# Altium PCB prototype.PcbDoc
Units mm, origin at the board's own origin, x right, y up, seen from the top; angles counter-clockwise.
Board outline 152.4 x 101.6 mm, 2 copper layers (Top Layer, Bottom Layer); 6 components, 0 nets, 36 pads, 0 vias.
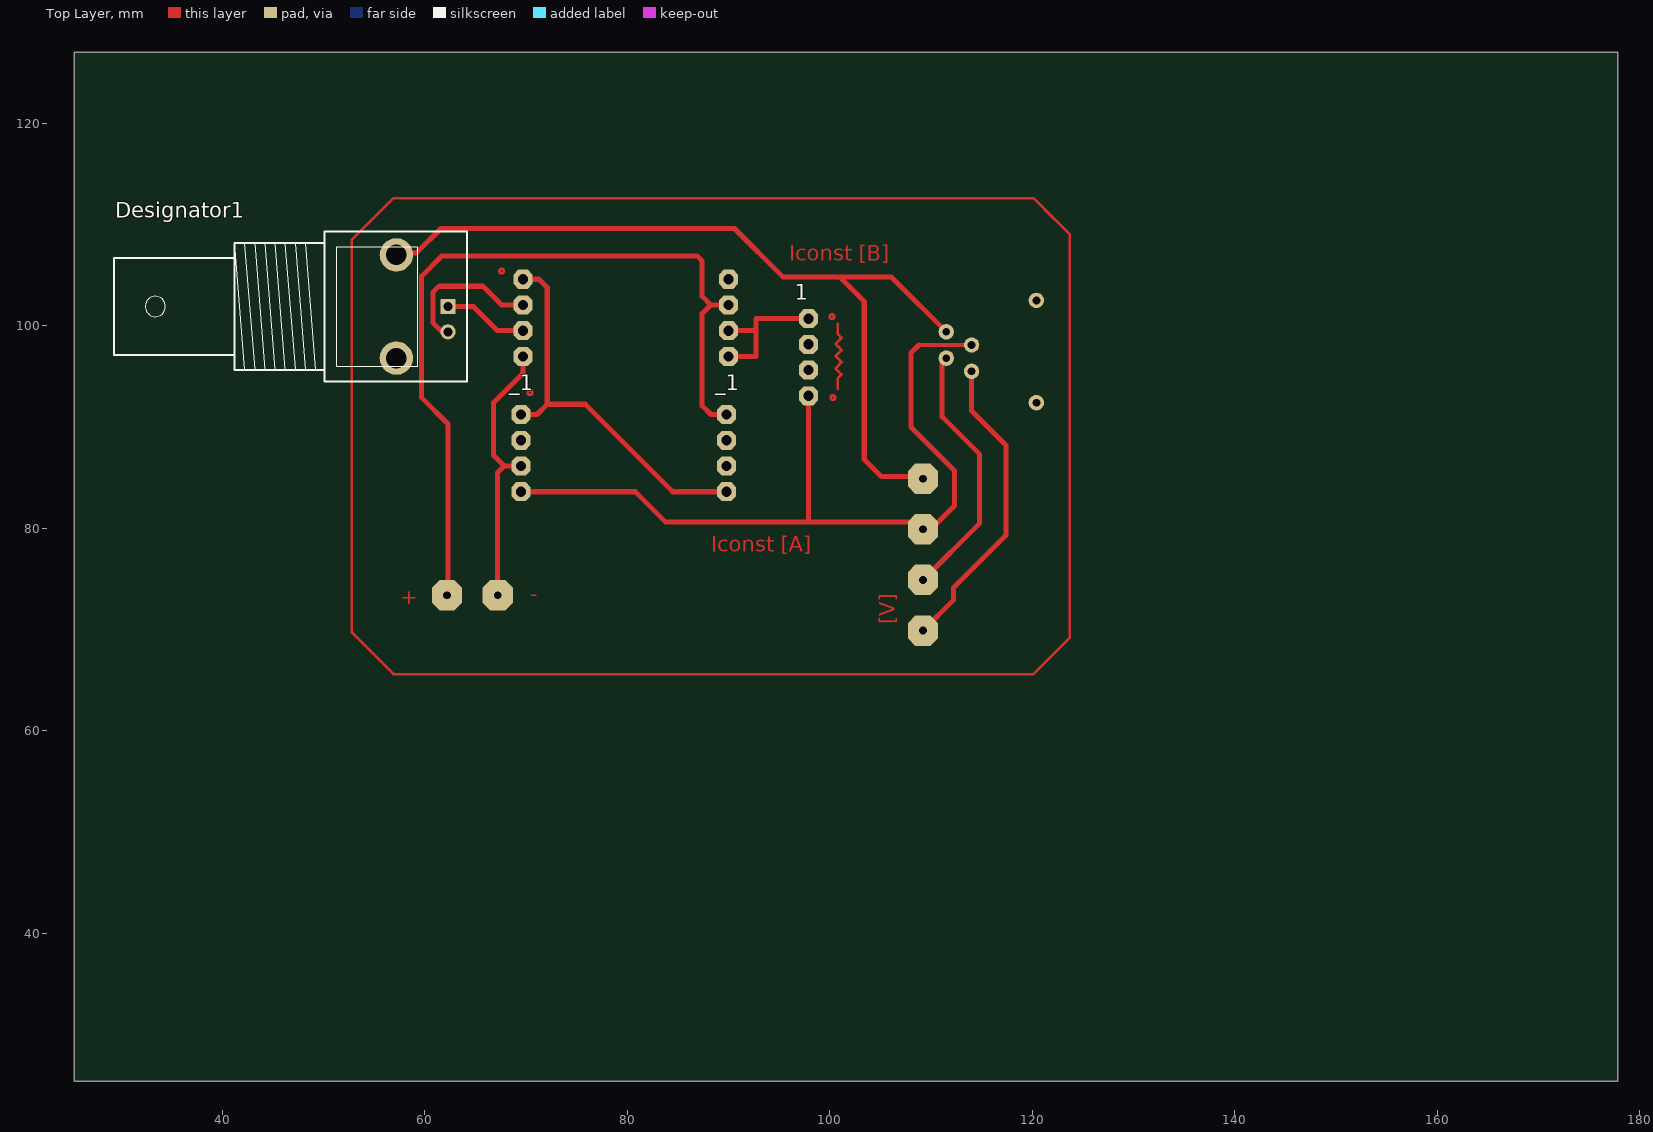
[diagram p0: Top Layer view]
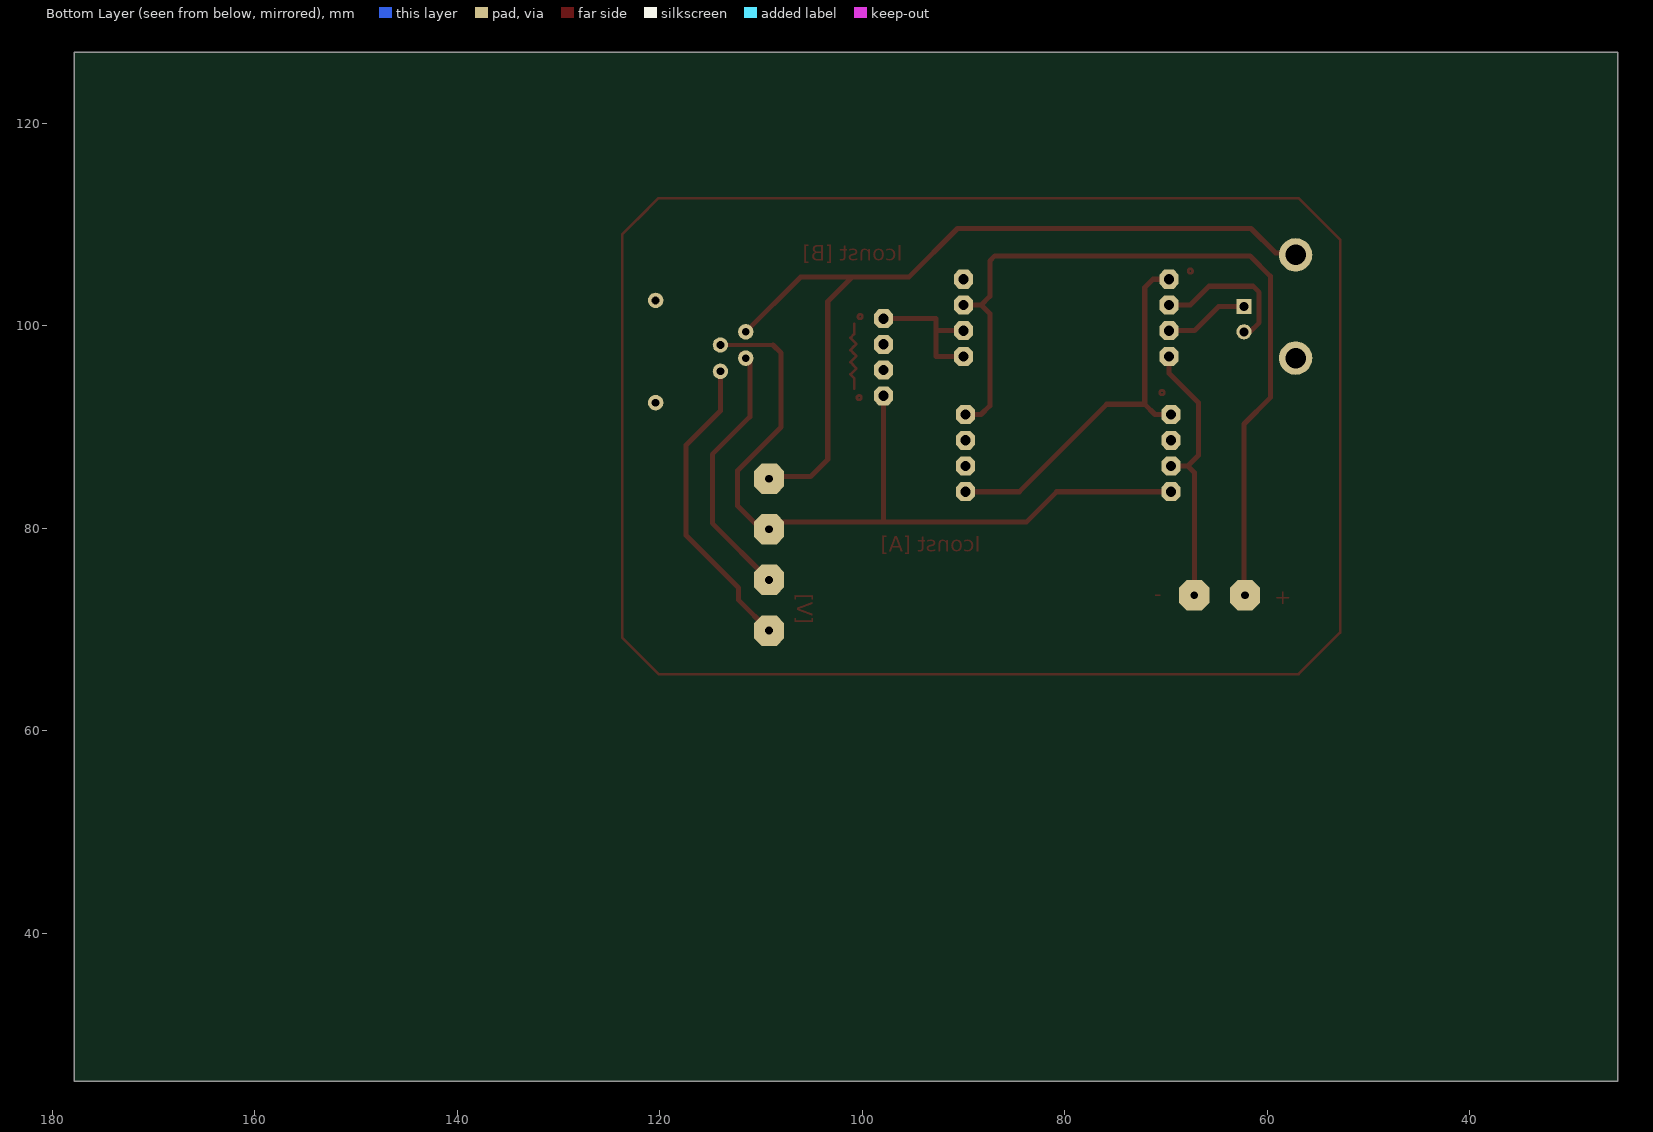
[diagram p1: Bottom Layer view, seen from below]

## Layer stack, top to bottom
Top Solder: solder mask 0.0102, Solder Resist, Dk 3.5
Top Layer: signal copper 0.0356
Dielectric 1: dielectric 0.32, FR-4, Dk 4.8
Bottom Layer: signal copper 0.0356
Bottom Solder: solder mask 0.0102, Solder Resist, Dk 3.5

## Board outline
25.4,25.4 177.8,25.4 177.8,127 25.4,127

## Design rules (kind name [scope] priority, off if disabled: settings)
Clearance [All] p1: gap=0.254 ignorepadtopadclearanceinfootprint=FALSE except(0: Arc-Hole Track-Hole SMDPad-Hole THPad-Hole Via-Hole Fill-Hole Poly-Hole Region-Hole Text-Hole)
PolygonConnect [All] p1: connectstyle=Relief reliefconductorwidth=0.254 reliefentries=4 polygonreliefangle="90 Angle" airgapwidth=0.254
RoutingVias [All] p1: holewidth=0.711 width=1.27 viastyle="Through Hole" minholewidth=0.711 minwidth=1.27 maxholewidth=0.711 maxwidth=1.27
SolderMaskExpansion [All] p1: expansion=0.102
Width [All] p1: maxlimit=0.254 minlimit=0.254 preferedwidth=0.254
30 further rules are at their usual default settings.

## Components (designator, comment, footprint, x,y, rotation, side; value= is the part's Value field where it differs from the comment)
1 "Comment" 1X04#1 97.9,93.08 r90 top
_1 "Comment" 1X04#2 69.5,91.23 r270 top
_1 "Comment" 1X04#3 89.79,91.23 r270 top
Designator1 "Comment" "BNC_RA CON" 62.3,101.9 r0 top
? "Comment" 1X04#4 69.71,96.97 r90 top
? "Comment" 1X04#1 90,96.97 r90 top

## Footprints (in the part's own frame and the unit in brackets; to place one, negate y for a bottom-side part, rotate by r counter-clockwise, add the part's x,y. Pads: shape width x height; smd on the part's side, far side on the other; paste and mask are expansions set on the pad)
1X04#1 [mil]
  oct 74x74 hole 40: 5(0,0) 6(100,0) 7(200,0) 8(300,0)
1X04#2 [mil]
  oct 74x74 hole 40: 1(0,0) 2(200,0) 3(300,0) NC(100,0)
1X04#3 [mil]
  oct 74x74 hole 40: 4(300,0) 5(0,0) NC(100,0) NC(200,0)
1X04#4 [mil]
  oct 74x74 hole 40: 1(300,0) 2(200,0) 3(100,0) 4(0,0)
"BNC_RA CON" [mm] "Connector; BNC Elbow"
  rect 1.5x1.5 hole 0.9: 1(0,0)
  round 3.3 hole 2: 2(-5.1,-5.1) 2(-5.1,5.1)
  round 1.5 hole 0.9: 2(0,-2.5)
  silkscreen extent -33,-7.4 1.9,7.4

## Free pads (board coordinates)
  oct 3x3 hole 0.762: 1(62.2,73.4) 1(67.2,73.4) 1(109.2,69.9) 1(109.2,74.9) 1(109.2,79.9) 1(109.2,84.9)
  round 1.524 hole 0.762: 2(111.5,96.8) 2(111.5,99.4) 2(114,95.5) 2(114,98.1) 2(120.4,92.4) 2(120.4,102.5)

## Nets (pads, with @x,y where several pads share a name; then routed paths per layer and width w, separated by ;. In a path a pad name is that pad's centre, name@x,y a point inside that pad or via, vN(x,y) a via of type N, cw(c..) or ccw(c..) an arc to the next point about the centre after c; other vN are vias at no path point)
pads on no net: 1.5 1.6 1.7 1.8 ?.1 ?.2 ?.3 ?.4 ?.5 ?.6 ?.7 ?.8 _1.1 _1.2 _1.3 _1.4 _1.5 _1.NC Designator1.1 Designator1.2
copper on no net: | length 653.4
  Top Layer w0.254: 100.8,93.8 100.8,94.824 101.176,95.2 100.576,95.8 ; 100.8,96.776 101.176,96.4 ; 100.8,97.976 101.176,97.6 ; 100.8,100.2 100.8,99.176 101.176,98.8 100.576,98.2 ; 100.953,96.176 100.576,95.8 ; 100.953,97.376 100.576,97 ; 100.953,98.576 100.576,98.2 ; 122.2,110.5 120.1,112.6 ; 100.576,95.8 101.176,96.4 ; 100.576,97 101.176,97.6 ; 100.576,97 101.176,96.4 ; 100.576,98.2 101.176,97.6 ; 120.1,112.6 123.7,109 123.7,69.2 120.1,65.6 56.9,65.6 52.8,69.7 52.8,108.5 56.9,112.6 120.1,112.6 ; 67.824,105.4 ccw(c67.6,105.4) 67.824,105.4 ; 70.624,93.4 ccw(c70.4,93.4) 70.624,93.4 ; 100.424,100.9 ccw(c100.2,100.9) 100.424,100.9 ; 100.524,92.9 ccw(c100.3,92.9) 100.524,92.9
  Top Layer w0.4: 108.8,98.1 114,98.1
  Top Layer w0.5: 56.6,107 57.5,107 57.7,107.2 59.2,107.2 61.61,109.61 90.59,109.61 95.4,104.8 101,104.8 ; 62.3,99.4 61.7,99.4 60.8,100.3 60.8,103.3 61.4,103.9 65.75,103.9 67.6,102.05 69.71,102.05 ; 62.3,101.9 64.8,101.9 67.19,99.51 69.71,99.51 ; 62.6,73.4 62.3,73.7 62.3,90.3 59.7,92.9 59.7,104.89 61.71,106.9 86.9,106.9 87.4,106.4 87.4,102.9 88.25,102.05 ; 67.5,73.4 67.19,73.71 67.19,85.49 67.85,86.15 ; 69.5,83.61 80.79,83.61 83.8,80.6 109.2,80.6 ; 69.5,86.15 67.85,86.15 ; 69.5,91.23 71.08,91.23 72.1,92.25 ; 69.71,96.9 69.71,95.31 66.8,92.4 66.8,87.2 67.85,86.15 ; 69.71,104.59 71.29,104.59 72.1,103.78 72.1,92.25 ; 89.79,83.61 84.49,83.61 75.85,92.25 72.1,92.25 ; 89.79,91.23 88.27,91.23 87.4,92.1 87.4,101.2 88.25,102.05 ; 90,96.97 92.7,96.97 92.7,99.51 ; 90,99.51 92.7,99.51 ; 90,102.05 88.25,102.05 ; 97.9,80.7 97.9,93.08 ; 97.9,100.7 92.7,100.7 92.7,99.51 ; 108.8,98.1 108,97.3 108,90 112.3,85.7 112.3,82.2 109.6,79.5 ; 109.2,69.9 112.2,72.9 112.2,74.1 117.4,79.3 117.4,88.2 114,91.6 114,95.5 ; 109.2,74.9 114.8,80.5 114.8,87.3 111.1,91 111.1,96.4 111.9,97.2 ; 109.2,85.1 105.1,85.1 103.4,86.8 103.4,102.4 101,104.8 ; 111.5,99.4 106.1,104.8 101,104.8

## Other copper
Top Layer:
  text "Iconst [B]" at 96,106.4 h1.52
  text "Iconst [A]" at 88.3,77.7 h1.52
  text "-" at 70.4,72.8 h1.52
  text "+" at 57.6,72.5 h1.52
  text "[V]" at 106.4,70.5 h1.52 r90